# Altium PCB LowerPlumbingBayBoardPCB.PcbDoc
Units mm, origin at the board's own origin, x right, y up, seen from the top; angles counter-clockwise.
Board outline 63.5 x 76.2 mm, 4 copper layers (Top Layer, Int1 (GND), Int2 (PWR), Bottom Layer), stack 1.586 mm thick; 4 components, 39 nets, 13 pads, 0 vias.
Unrouted connection lines stored in the file: 6.
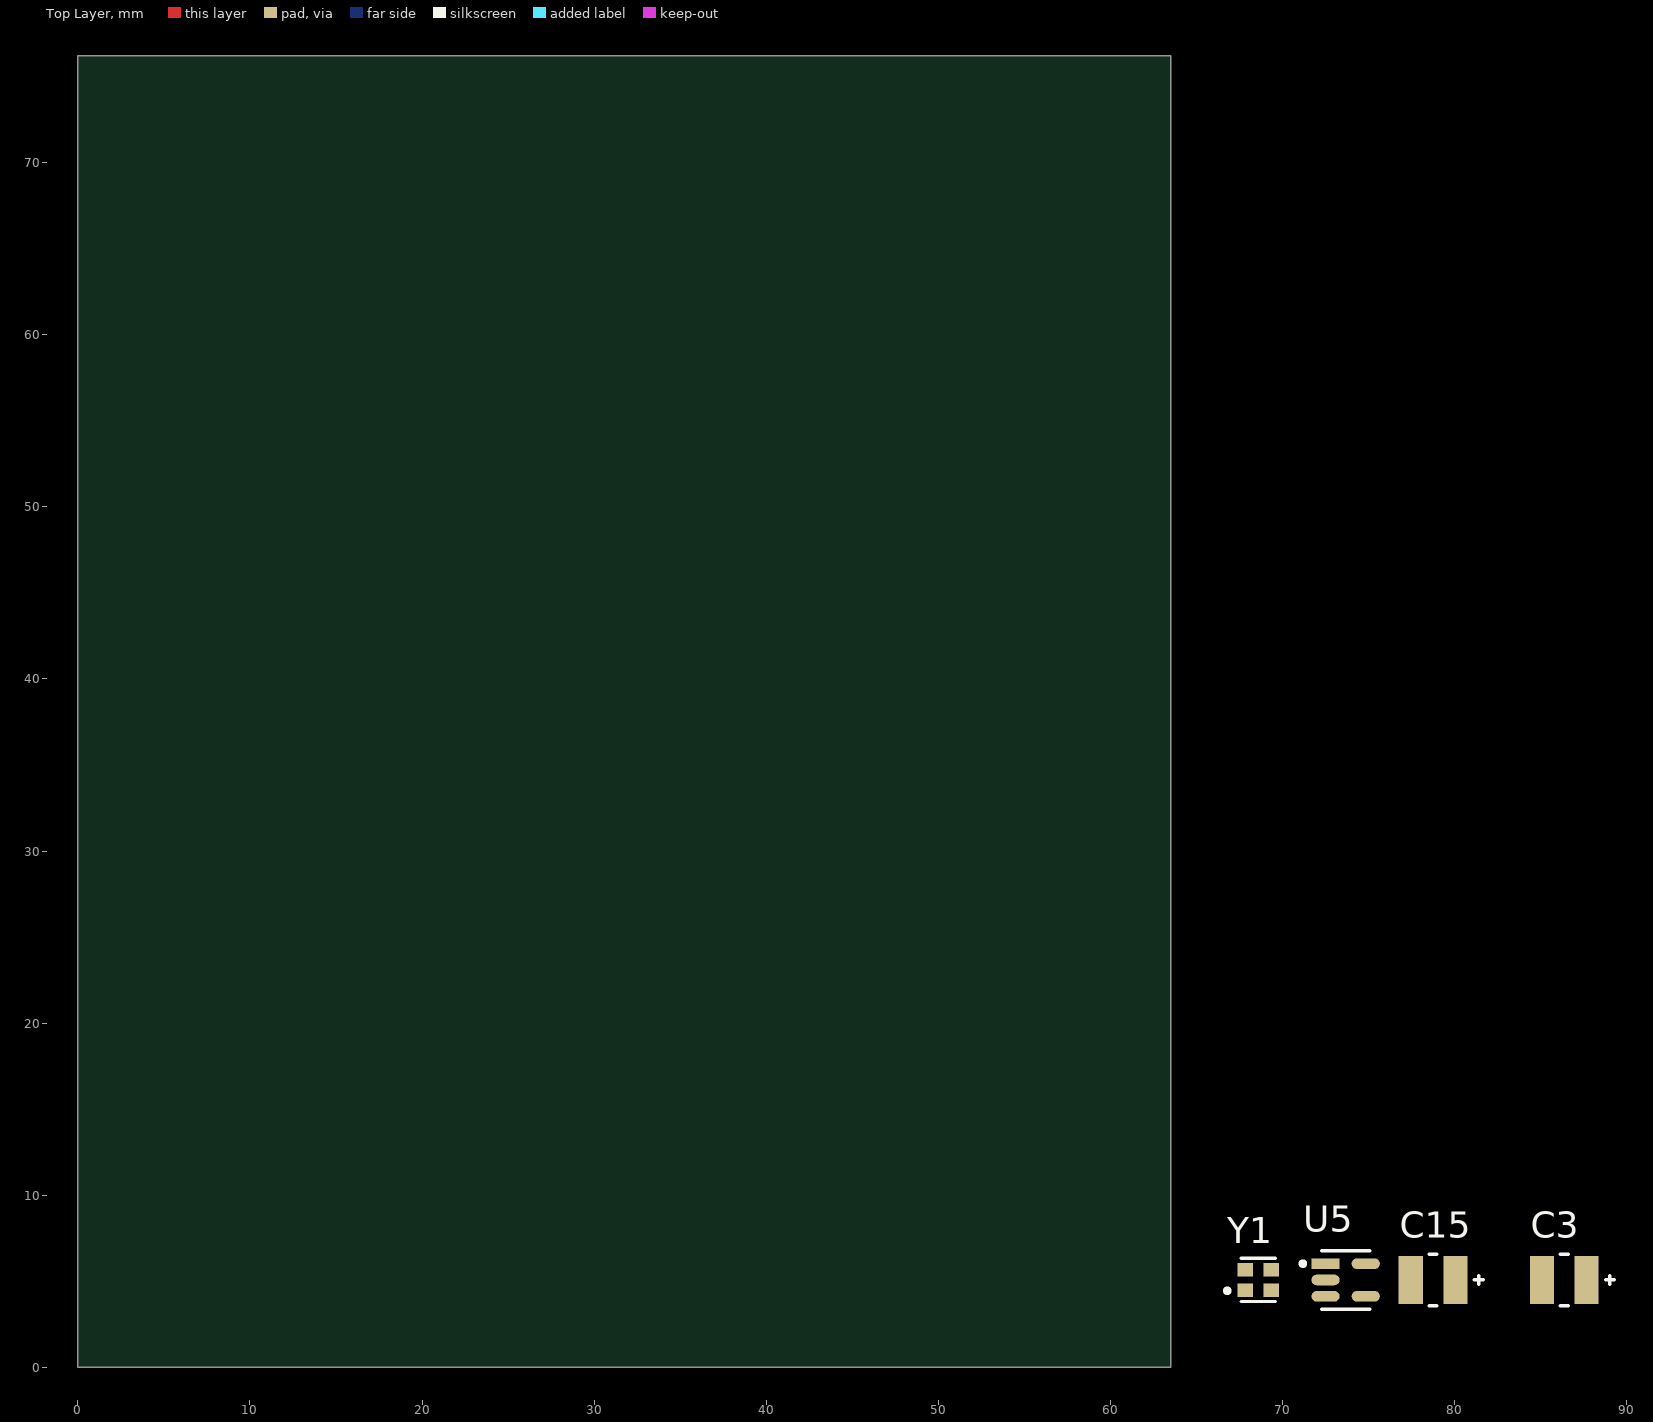
[diagram p0: Top Layer view]
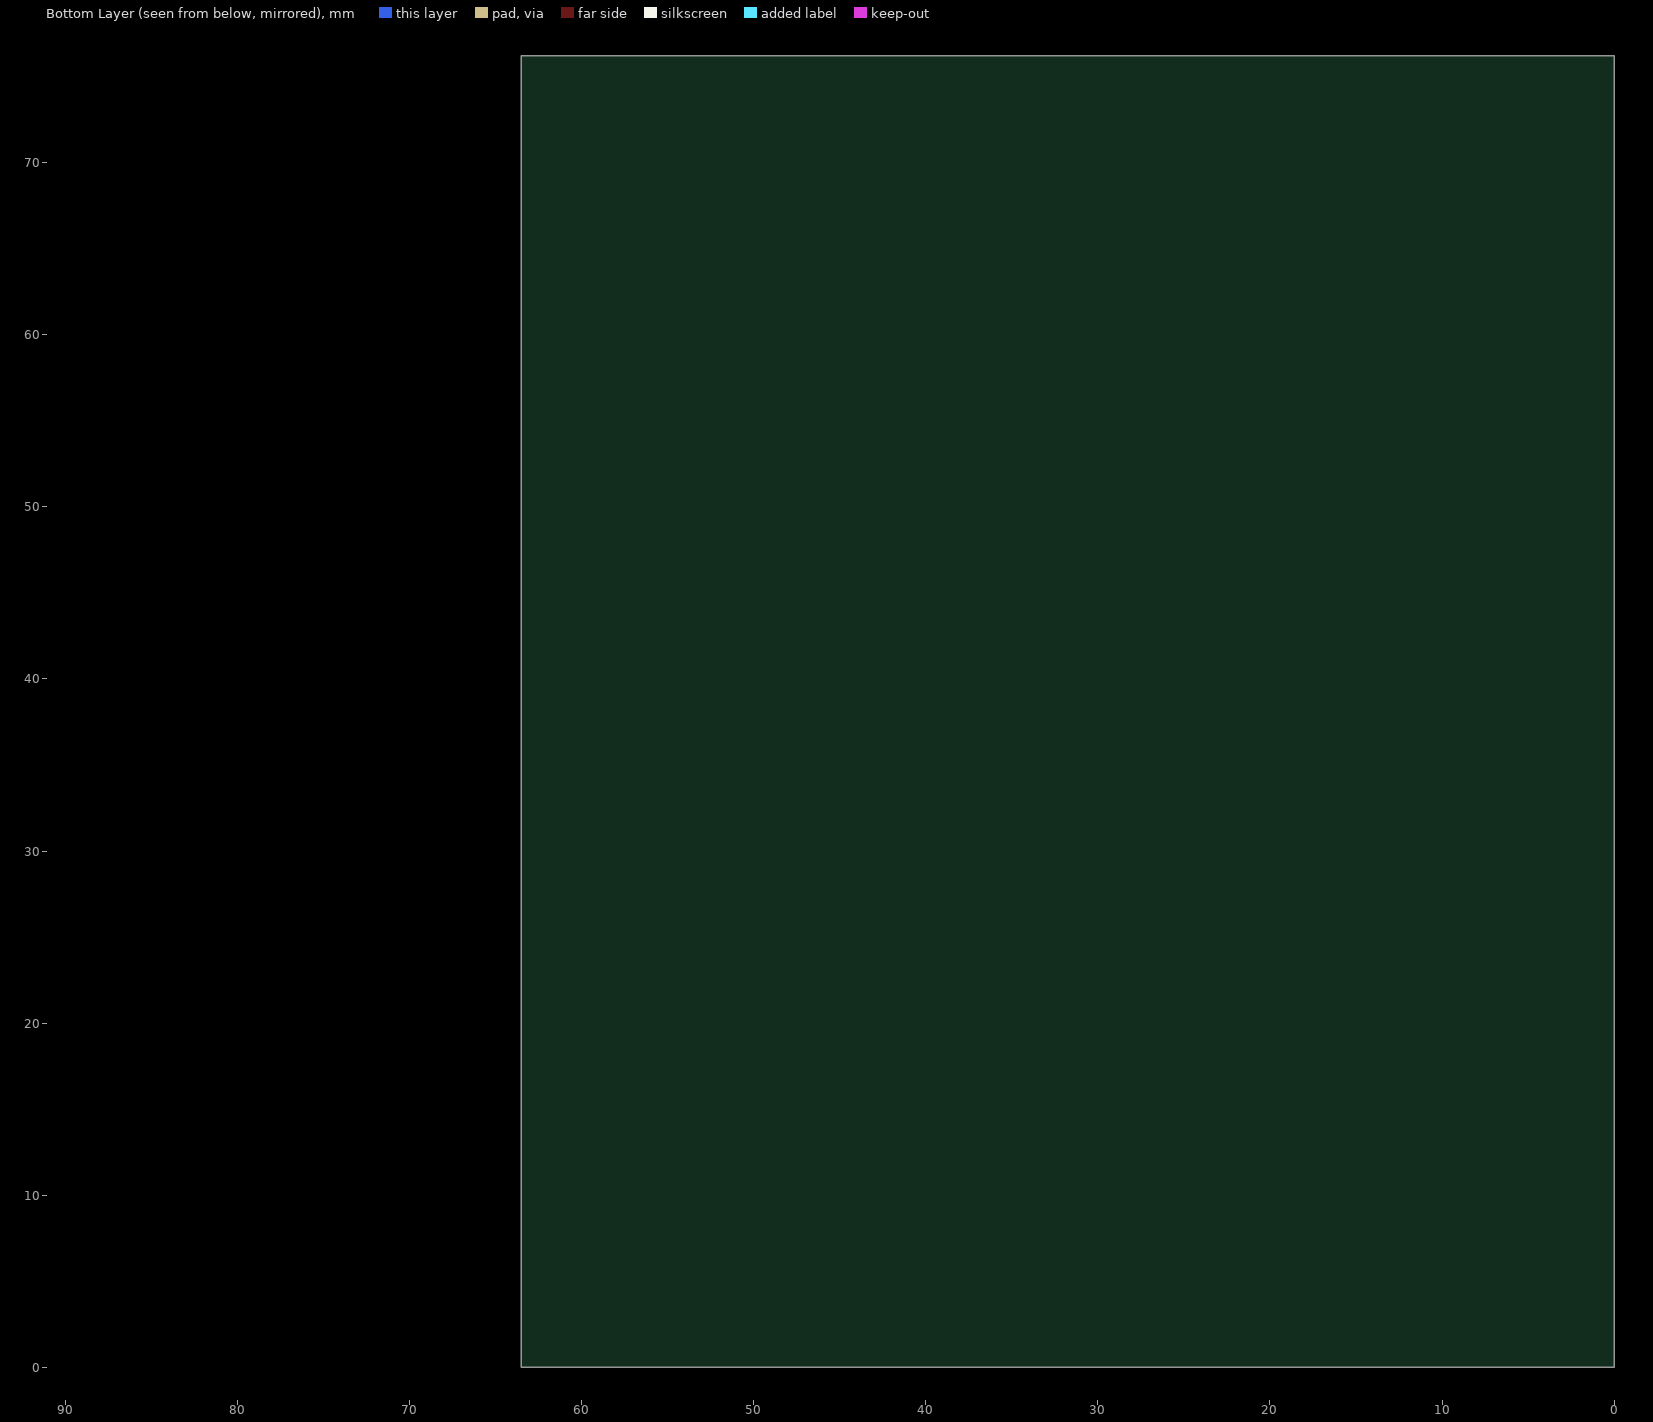
[diagram p1: Bottom Layer view, seen from below]
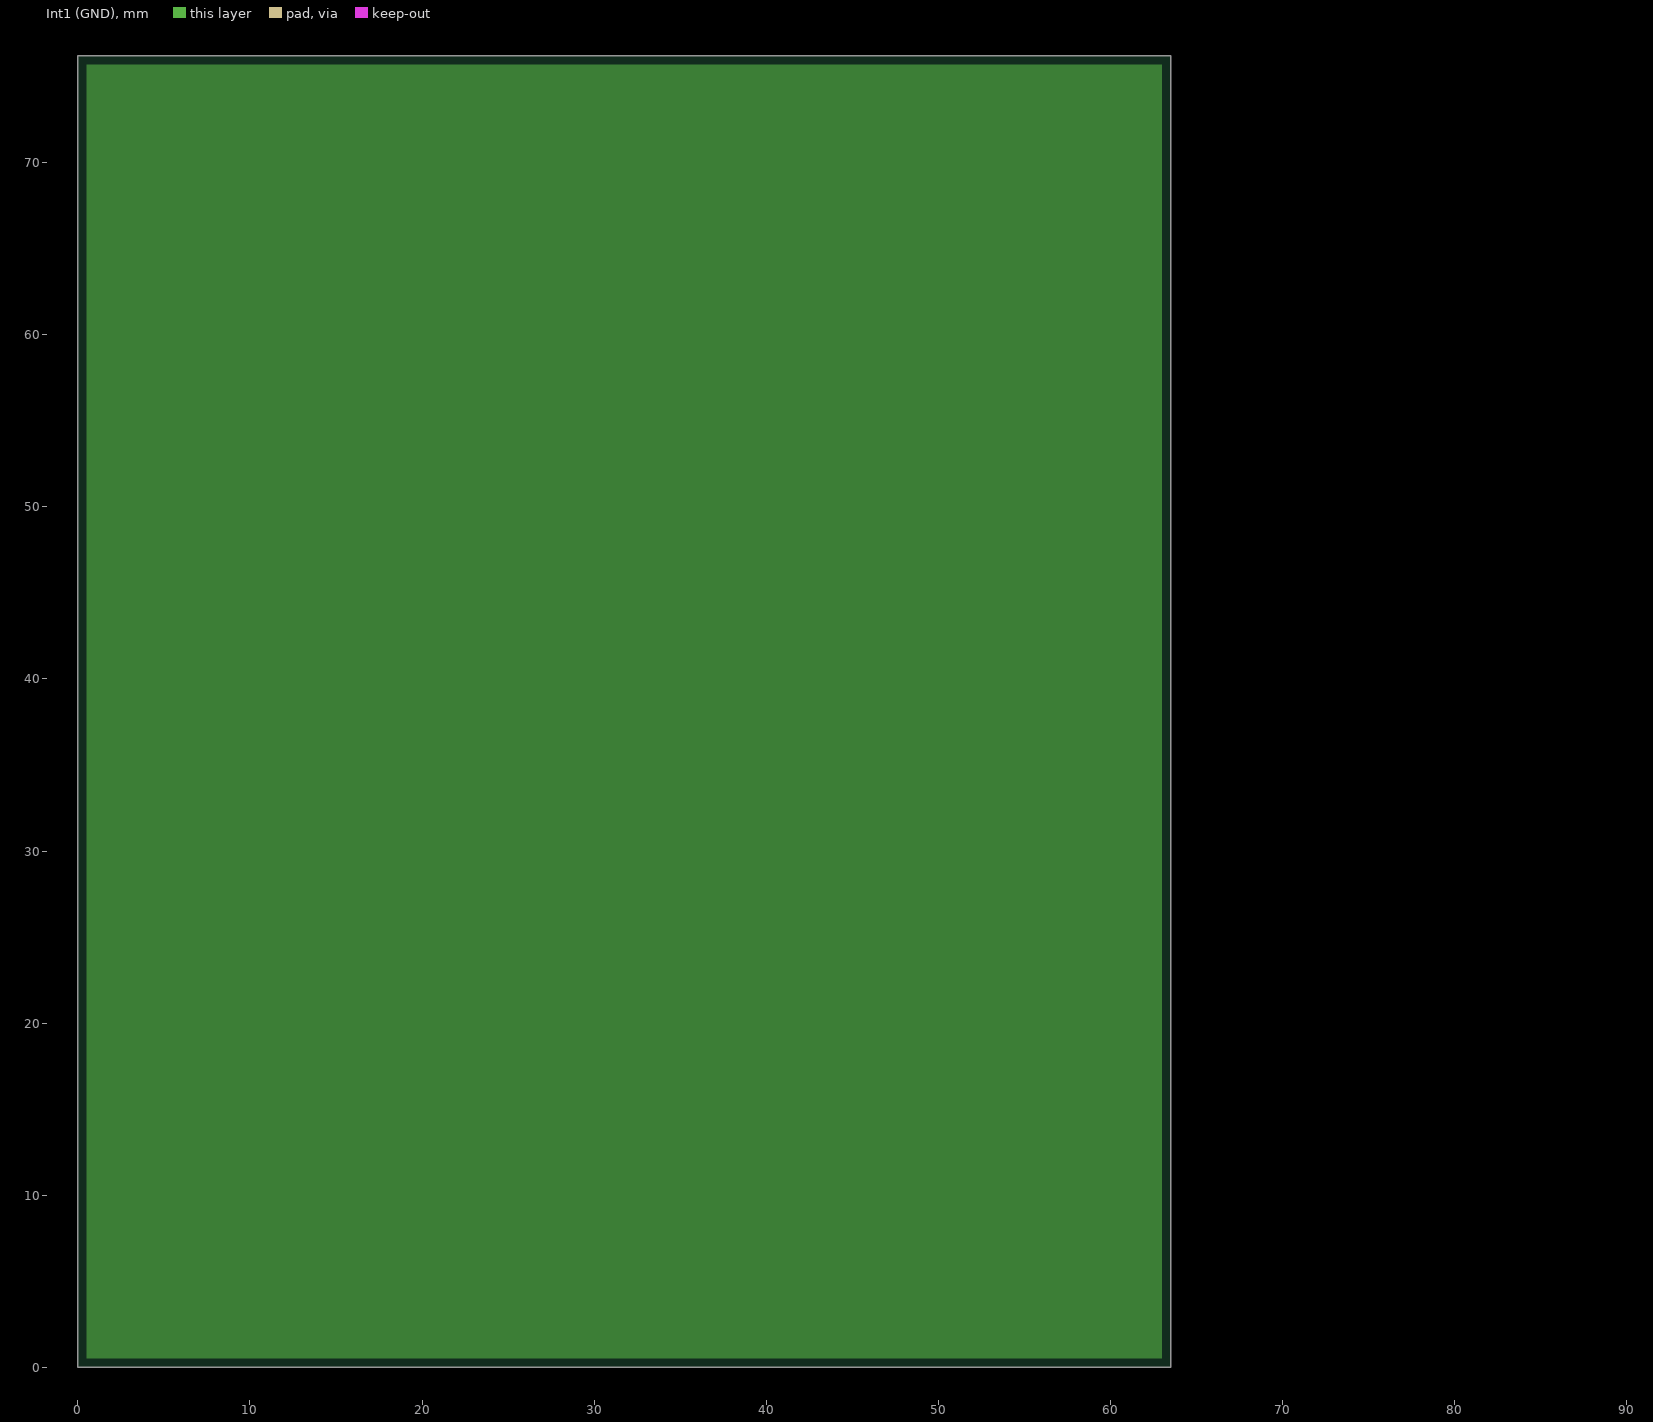
[diagram p2: Int1 (GND), clearances drawn from the general rule]
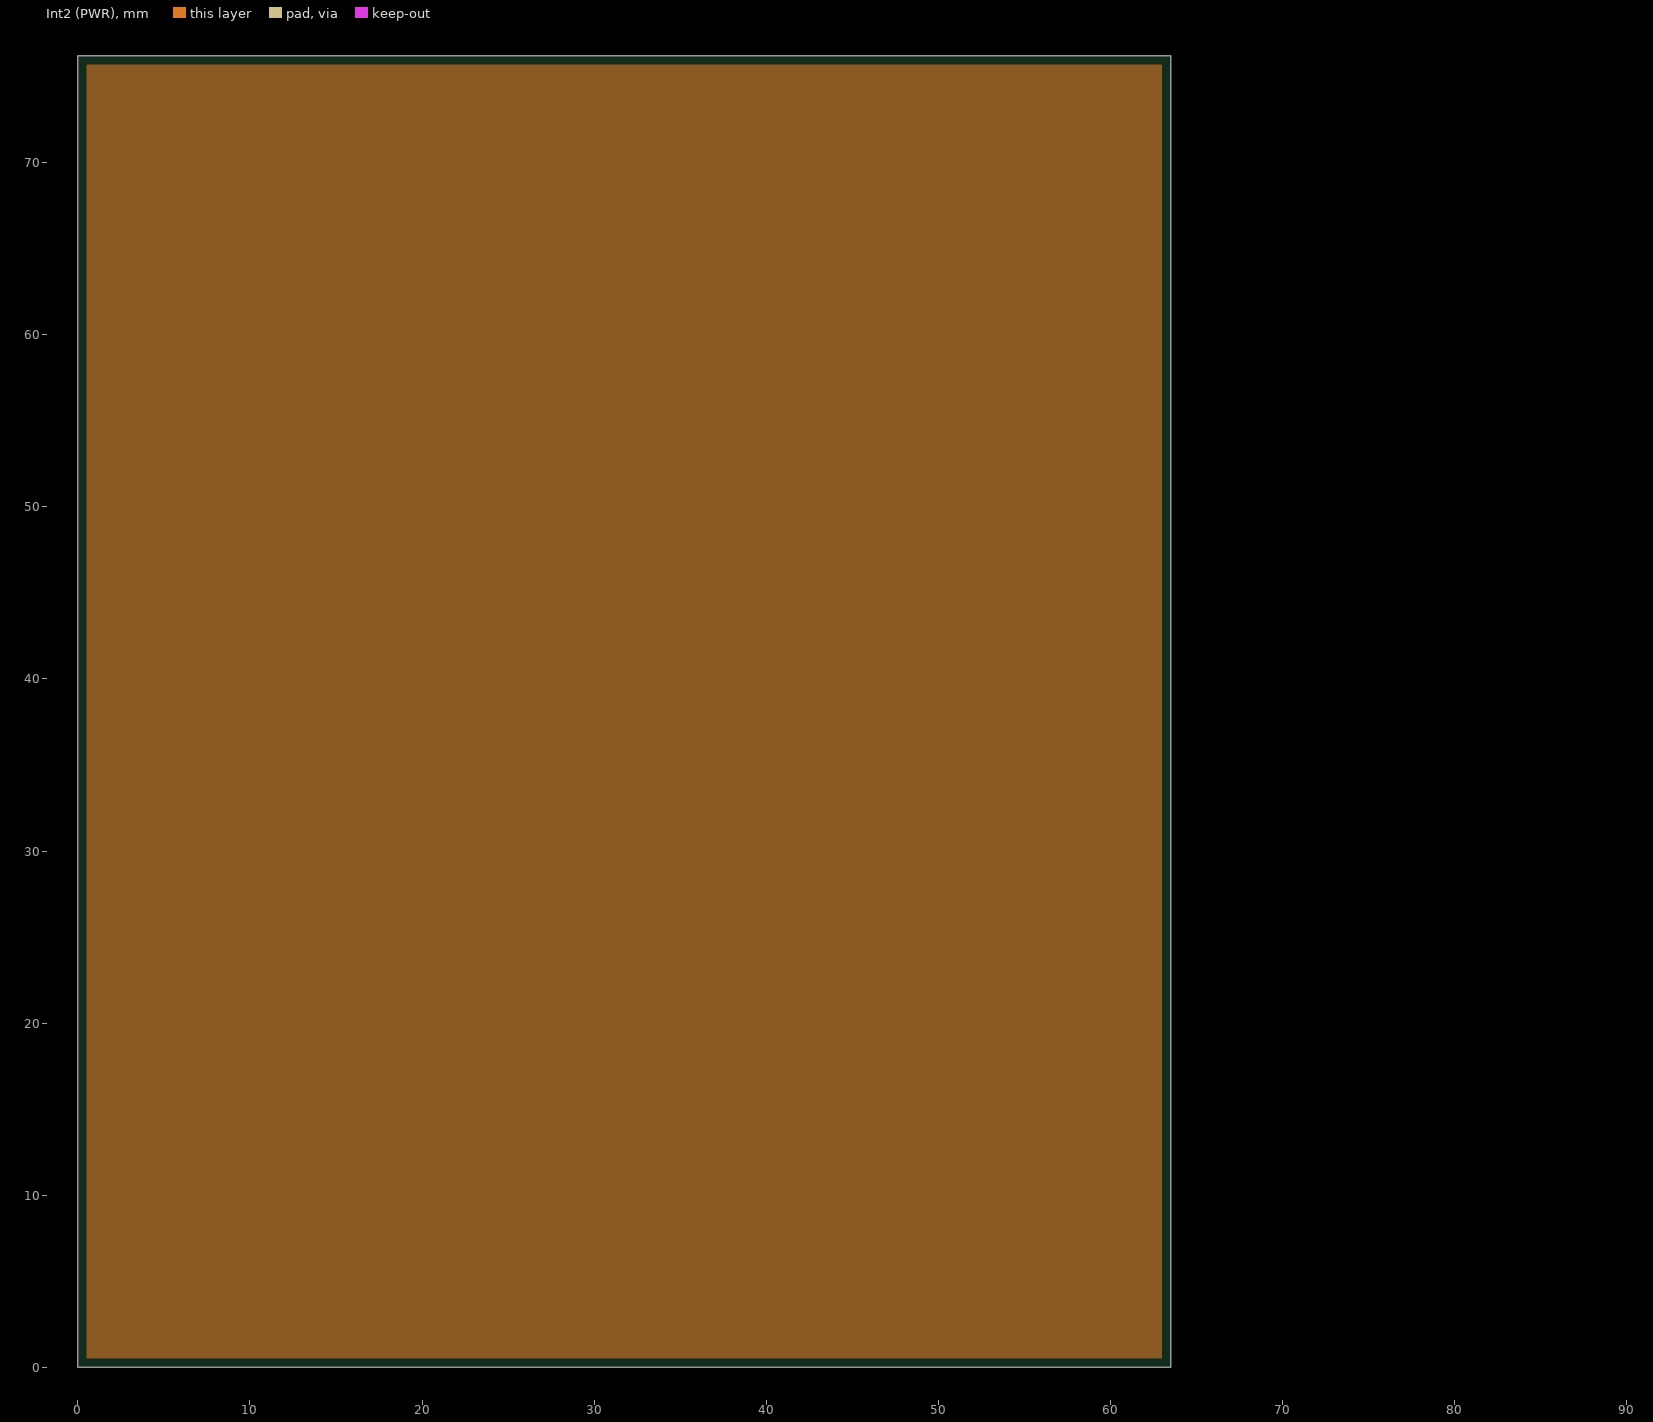
[diagram p3: Int2 (PWR), clearances drawn from the general rule]

## Layer stack, top to bottom
Top Solder: solder mask 0.0254, SM-001, Dk 4
Top Layer: signal copper 0.035
Dielectric 1: prepreg 0.2104, PP-017, Dk 4.4
Int1 (GND): plane copper 0.0152
Dielectric 3: core 1.065, Core-039, Dk 4.6
Int2 (PWR): plane copper 0.0152
Dielectric 5: prepreg 0.2104, PP-017, Dk 4.4
Bottom Layer: signal copper 0.035
Bottom Solder: solder mask 0.0254, SM-001, Dk 4

## Board outline
0,0 0,76.2 63.5,76.2 63.5,0

## Design rules (kind name [scope] priority, off if disabled: settings)
Clearance [All] p1: gap=0.254 ignorepadtopadclearanceinfootprint=FALSE
DiffPairsRouting [All] p1: maxlimit=0.254 minlimit=0.254 mostfreqgap=0.254 toplayer_minwidth=0.381 toplayer_maxwidth=0.381 toplayer_prefwidth=0.381 bottomlayer_minwidth=0.381 bottomlayer_maxwidth=0.381 bottomlayer_prefwidth=0.381 maxuncoupledlength=12.7
PlaneClearance [All] p1: clearance=0.508
PlaneConnect [All] p1: planeconnectstyle=Relief reliefexpansion=0.508 reliefentries=4 reliefconductorwidth=0.254 reliefairgap=0.254
PolygonConnect [All] p1: connectstyle=Relief reliefconductorwidth=0.254 reliefentries=4 polygonreliefangle="90 Angle" airgapwidth=0.254
RoutingVias [All] p1: holewidth=0.711 width=1.27 viastyle="Through Hole" minholewidth=0.711 minwidth=1.27 maxholewidth=0.711 maxwidth=1.27
SolderMaskExpansion [All] p1: expansion=0.102 istentingtop=FALSE
SupplyNets "Schematic Supply Nets_2" [InNet('GND')] p1: voltage=0.000
SupplyNets "Schematic Supply Nets_1" [InNet('+12')] p2: voltage=0.000
SupplyNets "Schematic Supply Nets" [InNet('+3V3')] p3: voltage=0.000
Width [All] p1: maxlimit=0.254 minlimit=0.254 preferedwidth=0.254
27 further rules are at their usual default settings.

## Classes and differential pairs
differential pair TX: +TX_P -TX_N
differential pair RX: +RX_P -RX_N

## Components (designator, comment, footprint, x,y, rotation, side; value= is the part's Value field where it differs from the comment)
C3 "TAJB106K025RNJ" FP-TAJB-MFG 86.36,5.08 r0 top
C15 "TAJB106K025RNJ" FP-TAJB-MFG 78.74,5.08 r0 top
U5 "MCP6001T-I/OT" FP-C04-091-OT-IPC_A 73.66,5.08 r0 top
Y1 "SIT8920BM-73-33N-8.000000" FP-SIT8920BM-73-33N-8_000-MFG 68.58,5.08 r0 top

## Footprints (in the part's own frame and the unit in brackets; to place one, negate y for a bottom-side part, rotate by r counter-clockwise, add the part's x,y. Pads: shape width x height; smd on the part's side, far side on the other; paste and mask are expansions set on the pad)
FP-C04-091-OT-IPC_A [mil]
  rect 64.5x24.33 smd paste+0 mask+0: 1(-45.91,37.4)
  rrect100% 64.5x24.33 smd paste+0 mask+0: 2(-45.91,0) 3(-45.91,-37.4) 4(45.91,-37.4) 5(45.91,37.4)
  silkscreen extent -103,-67 55,67
FP-SIT8920BM-73-33N-8_000-MFG [mm]
  rect 0.9x0.8 smd paste+0 mask+0: 1(-0.75,-0.6) 2(0.75,-0.6) 3(0.75,0.6) 4(-0.75,0.6)
  silkscreen extent -1.92,-1.25 1,1.25, body extent -1.3,-1.1 1.3,1.1, height 0.25
FP-TAJB-MFG [mm]
  rect 1.4x2.8 smd paste+0 mask+0: 1(-1.3,0) 2(1.3,0)
  silkscreen extent -0.23,-1.5 2.9,1.5, body extent -2.1,-1.6 2.1,1.6, height 0.25

## Part data
C3 C15: library part CMP-04424-000481-1, "10uF 25V  ±10% 2.5Ω 1210  SMD Tantalum Capacitor", Capacitance=10uF, Case Code (Imperial)=1210, Case Code (Metric)=3528, ESR (Equivalent Series Resistance)=2.5R, Leakage Current=2.5uA, Max Operating Temperature=125°C, Min Operating Temperature=-55°C, Package Quantity=1, Tolerance=10%, Voltage Rating=25V, Case/Package=1210, Construction=Flat, Depth=2.8mm, Dissipation Factor=6%, Features="General Purpose", Height=2.1mm, Height - Seated (Max)=0.083inch, Lead Free="Lead Free", Length=3.5mm, Mount="Surface Mount", Packaging="Tape and Reel", Polarity=Polar, Radiation Hardening=No, REACH SVHC="No SVHC", RoHS Compliant=Yes, Series=TAJ, Termination=SMD/SMT, Voltage Rating (DC)=25V, Weight=0.000564oz, Width=0.11inch
U5: library part CMP-0187-00462-3, "IC OPAMP GP 1 CIRCUIT SOT23-5", Case/Package=SOT-23, Input Bias Current=1pA, Input Offset Voltage (Vos)=4.5mV, Max Operating Temperature=85°C, Max Supply Voltage=6V, Min Operating Temperature=-40°C, Min Supply Voltage=1.8V, Nominal Supply Current=100uA, Operating Supply Voltage=5.5V, Output Current=23mA, Package Quantity=1, Power Supply Rejection Ratio (PSRR)=86dB, Voltage Gain=112dB, Bandwidth=1MHz, Common Mode Rejection Ratio=60dB, Contact Plating=Tin, Gain Bandwidth Product=1MHz, Height=1.3mm, Lead Free="Lead Free", Length=3.1mm, Mount="Surface Mount", Number of Amplifiers=1, Number of Channels=1, Number of Circuits=1, Number of Elements=1, Number of Pins=5, Operating Supply Current=100uA, Output Current per Channel=23mA, Packaging="Tape and Reel", Radiation Hardening=No, REACH SVHC="No SVHC", Slew Rate=0.6V/µs, Unity Gain Bandwidth Product=1MHz, Voltage=6V, Width=1.8mm
Y1: library part CMP-25149-000010-1, "MEMS OSC XO 8.0000MHZ LVCM LVTTL"

## Nets (pads, with @x,y where several pads share a name; then routed paths per layer and width w, separated by ;. In a path a pad name is that pad's centre, name@x,y a point inside that pad or via, vN(x,y) a via of type N, cw(c..) or ccw(c..) an arc to the next point about the centre after c; other vN are vias at no path point)
+3V3: U5.5
+12: C3.2 C15.2
CS!U1: 
GND: C3.1 C15.1 U5.2 Y1.1 Y1.2
NetC4_2: Y1.4
NetC6_2: 
NetC7_1: 
NetD1_1: 
NetD2_1: 
NetD5_2: 
NetD6_2: 
NetD7_2: 
NetR2_1: 
NetR2_2: Y1.3
NetR6_1: 
NetR9_2: 
NetTP1_1: 
NetTP2_1: 
NRST: 
"PT1 ADC": U5.1 U5.4
"PT1 OUTPUT": U5.3
RX_N: 
RX_P: 
"SOL1 EN": 
"SOL1 PWR": 
"SOL2 EN": 
"SOL2 PWR": 
SPI1_MISO: 
SPI1_SCK: 
SWCLK: 
SWDIO: 
SWO: 
Thermcup1_V+: 
TX_N: 
TX_P: 
UART5_RX: 
UART5_TX: 
USART1_RX: 
USART1_TX: 

## Polygon pours and split planes (outlines as drawn)
no net on Int1 (GND) (split plane): 62.99,0.51 0.51,0.51 0.51,75.69 62.99,75.69
no net on Int2 (PWR) (split plane): 62.99,0.51 0.51,0.51 0.51,75.69 62.99,75.69